# Altium PCB GPSDO_V3.0.PcbDoc (part 2 of 2)
Units mil, origin at the board's own origin, x right, y up, seen from the top; angles counter-clockwise.
Board outline 3461 x 3930 mil, 2 copper layers (Top Layer, Bottom Layer); 105 components, 60 nets, 438 pads, 188 vias.
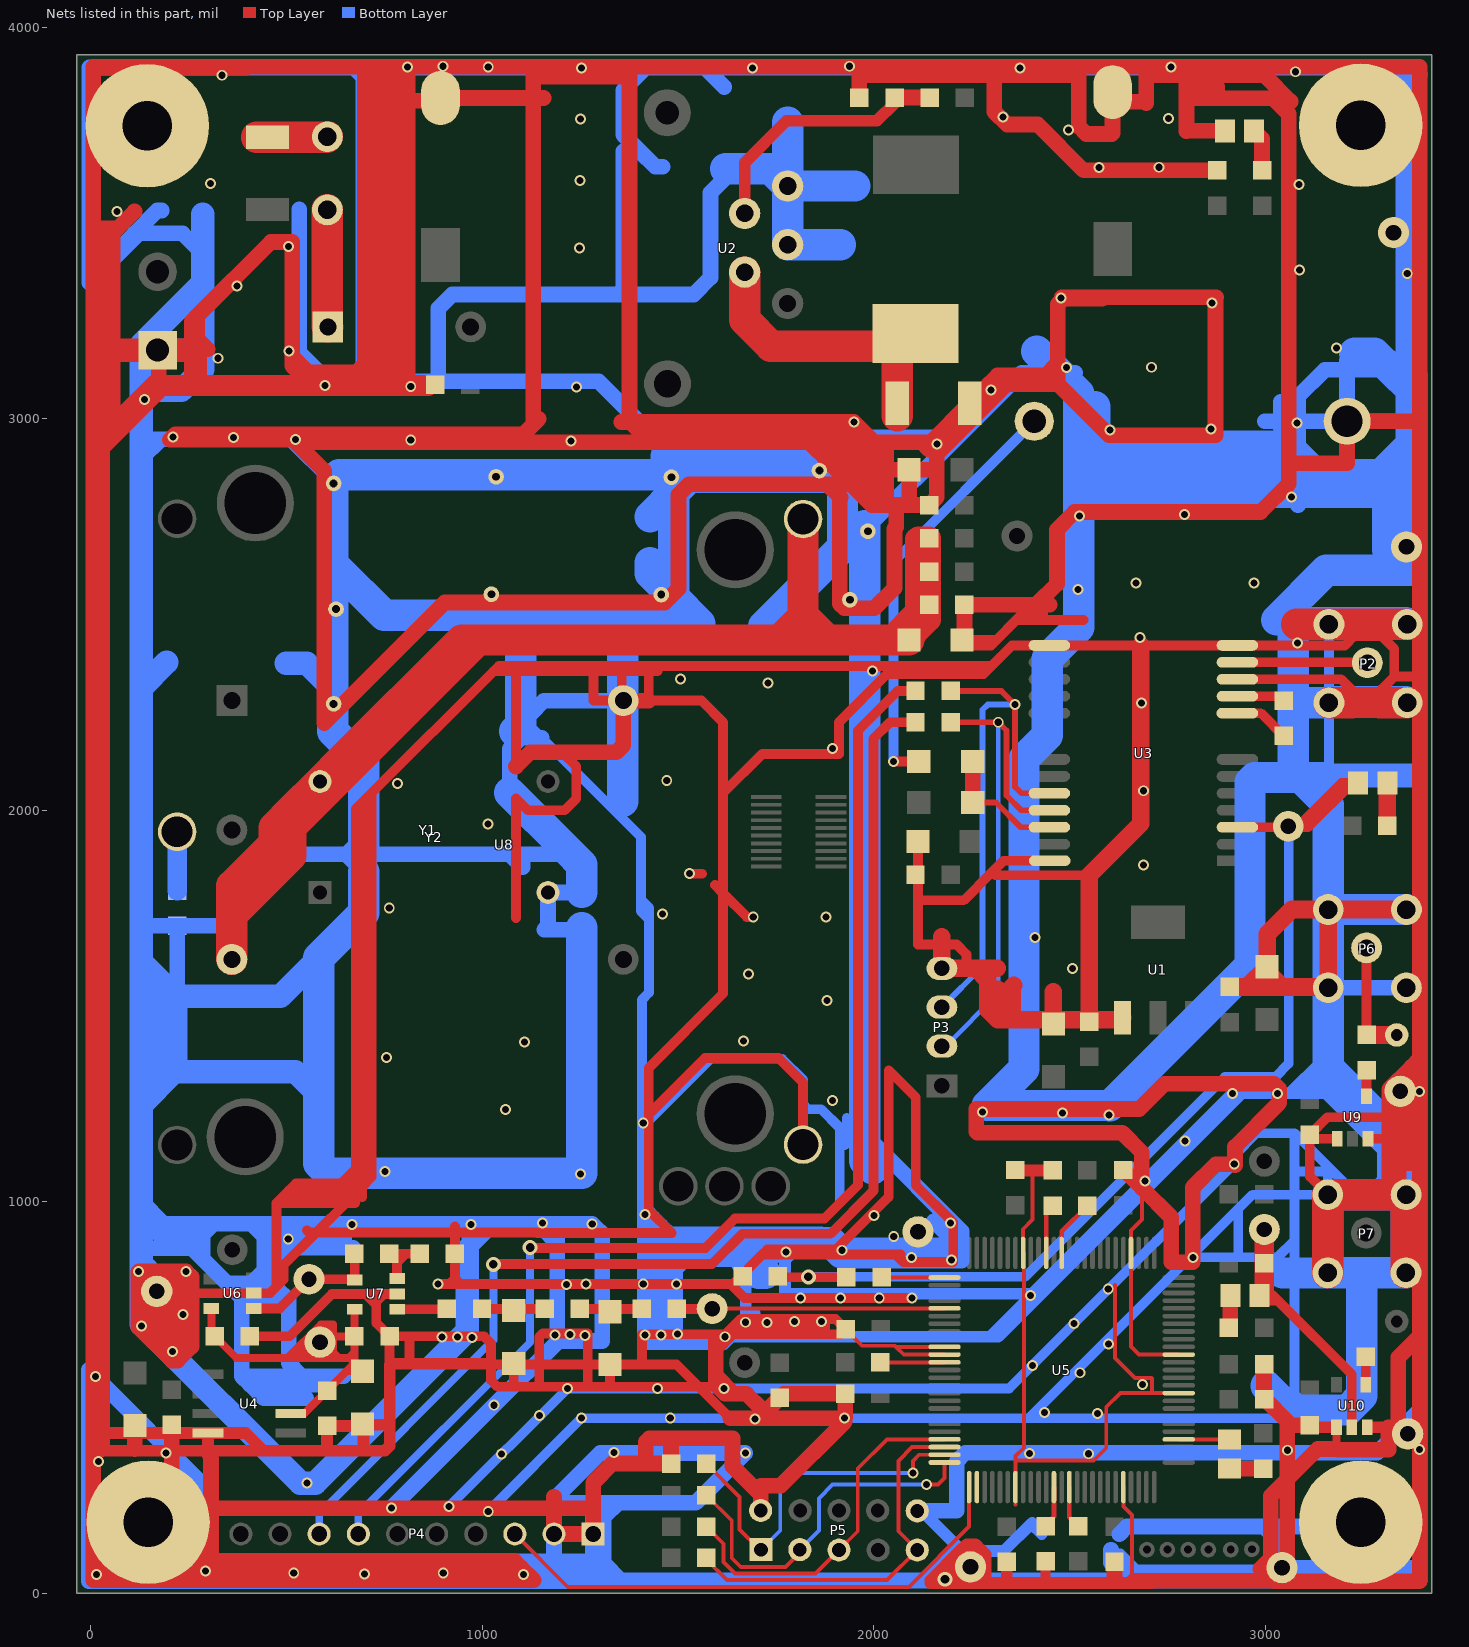
[diagram p2: the nets of this part, all layers, seen from the top]

## Via types
v1: diameter 28, hole 18, Top Layer to Bottom Layer, 176 vias
v2: diameter 38, hole 22, Top Layer to Bottom Layer, 9 vias
v3: diameter 58, hole 38, Top Layer to Bottom Layer, 3 vias

## Nets (pads, with @x,y where several pads share a name; then routed paths per layer and width w, separated by ;. In a path a pad name is that pad's centre, name@x,y a point inside that pad or via, vN(x,y) a via of type N, cw(c..) or ccw(c..) an arc to the next point about the centre after c; other vN are vias at no path point) (continued)
GND: BT1.2 C1.1 C2.1 C3.1 C4.1 C5.1 C6.1 C7.1 C8.1 C9.2 C10.1 C11.2 C12.2 C13.1 C14.1 C15.1 C18.2 C19.2 C20.2 C21.1 C22.1 C23.2 C24.1 C25.2 C26.1 C27.2 C28.1 C29.1 C30.1 C31.1 C32.1 C33.1 C34.1 C35.1 C36.2 D2.1 L7.1 LED2.2 P1.1 P2.2 P3.4 P4.1 P4.2 P5.2 P5.10 P6.2 P7.2 pad. pad.0@620,2272 pad.0@620,2835 pad.0@626,2514 pad.0@1023,2552 pad.0@1035,2852 pad.0@1457,2551 pad.0@1483,2851 pad.0@1861,2868 pad.0@1939,2538 pad.0@1985,2713 pad.1@168,771 pad.2 pad.3 pad.4 pad.6 pad.7 pad.10 R4.1 R10.1 R15.1 R23.1 R27.2 U1.1 U2.3 U2.5 U3.10 U3.12 U3.13 U3.24 U4.4 U5.10 U5.11 U5.32 U5.46 U5.60 U5.65 U5.79 U5.93 U6.2 U7.2 U8.4 U9.1 U9.3 U10.1 U10.3 Y1.5 Y2.4 | length 179678.4
  Top Layer w10: C29.1@1928,674 1970,632 2054,632 2056.94,629.06 ; U5.11@2180.79,609.37 2076.63,609.37 2056.94,629.06 ; U5.10@2180.79,629.06 2056.94,629.06 ; 2361.89,226.11 U5.32@2361.89,270.79 2361.89,339 ; C31.1@2362,1081 C31.1@2363,1080 ; 2403,1080 2406,1077 2406,954 2381.57,929.57 U5.93@2381.57,869.21 2383.35,867.43 2383.35,800 2383.35,371.35 2361.89,349.89 2361.89,339 ; 2616,787 2616,601 2667,550 2710,550 2711,549 2711,510.94 ; U5.46@2637.48,270.79 2637.48,221.52 2659.85,199.15 2659.85,35.99 2664,31.84 ; 2685,1035 2685,954 2657.17,926.17 U5.79@2657.17,869.21 2657.17,629.83 2677.63,609.37 U5.65@2779.21,609.37 ; U5.60@2779.21,510.94 2711,510.94 ; 2361.89,339 2562,339 2594,371 2594,475 2629.94,510.94 2711,510.94
  Top Layer w20: 3182,368 U10.1@3182,424
  Top Layer w25: 235,769 237.63,766.37 257,766.37 U6.2@416.08,766.37 457.37,766.37 474,783 ; C18.2@406,656 507,656 615.37,764.37 701,764.37 ; 552,927 557.5,921.5 575.5,921.5 ; 670,1011 665,1011 ; 671.5,1028.5 620.5,1028.5 ; 675,997 651,997 ; 677,1004 677,1023 ; 693,1012 693,1039 ; 763,584 1022,584 ; U7.2@782.08,764.37 748.37,764.37 ; v1(887,790) 916,790 ; 930,937 930,921.5 ; 1018,588 814,588 ; C21.1@1080,586.8 C21.1@1080,584 ; C21.1@1080,587 C21.1@1077,584 ; 1086,1725 1086,2030 1116,2000 1210,2000 1240,2030 1240,2112 1204,2148 ; 1086,2112 1086,2355 ; 1269,528 1269,584 ; C22.1@1326,583.8 1326,527 ; Y1.5@1356,2284.32 1356,2355 ; Y1.5@1360,2280.32 1284,2280.32 1284,2355 ; v1@1408,655 1408,584 ; v1@1408,661.5 v1(1498,661.5) 1583.5,661.5 ; 1448,2355 1424,2355 ; v1(1529,1838) 1562,1838 ; 1590.5,527 1553,527 ; 1594,1809 1615,1788 ; 1596.25,616 1641.75,661.5 ; 1596.25,648.75 1583.5,661.5 ; v1(1620,655) 1620,660 v1@1621.5,661.5 ; C13.1@1665,809 1646,790 1640,790 ; v1(1692,1727) 1676,1727 1615,1788 ; 1711,450 1630,450 1553,527 ; U8.4@1819.21,1145.79 1819.21,1304.79 1757,1367 1569,1367 1425,1223 ; 1864,680 1858,686 1646,686 ; 2069,865 2056,865 ; v1(2098,754) 1670,754 1634,790 ; C6.1@2112.96,1920 2112.96,1770 ; C23.2@2231.6,2441.6 C23.2@2225,2435 ; 2237,1596 2237,1632 2211.96,1657.04 2174,1657.04 2112.96,1657.04 2112.96,1770 ; 2404.5,2526.5 2403,2525 2386.5,2508.5 ; 2433,2503 2427.5,2508.5 2386.5,2508.5 ; 2439,27.5 R27.2@2439,81 ; U3.24@2449.5,1871.18 2331.18,1871.18 2302.5,1842.5 ; 2536,2486 2364,2486 ; 2550,1834 2311,1834 2302.5,1842.5 ; U3.10@2929,2334.75 2929.25,2335 3194,2335 3219,2310 3219,2278.03 3221.76,2275.27 3222,2275.03 3292,2275.03 3292.24,2275.27 3298,2281.03 3298,2310 3330,2342 ; P7.2@3159.97,1018.03 3114,1064 C27.2@3114,1171 ; U9.1@3184,1161 3124,1161 C27.2@3114,1171 ; U9.3@3262.74,1160.96 3317,1160.96 3348,1160.96 ; pad.3@3345,1282 3348,1279 3348,1216 ; P7.2@3348,1030 3348,1099 3348,1160.96 ; 3394.5,1161 3394.46,1160.96 3374,1160.96 3348,1160.96 ; 3394.5,1216 3374,1216 3348,1216 ; 3394.5,2342 3330,2342 ; 474,783 492,801 492,838 575.5,921.5 ; 474,783 474,997 ; 474,997 651,997 ; 474,997 488,1011 ; 488,1011 505.5,1028.5 ; 488,1011 665,1011 ; 505.5,1028.5 620.5,1028.5 ; 505.5,1028.5 524,1047 639,1047 ; 575.5,921.5 578,924 651,997 ; 575.5,921.5 930,921.5 ; 620.5,1028.5 639,1047 ; 639,1047 677,1085 ; 639,1047 677,1047 ; 651,997 665,1011 ; 665,1011 677,1023 ; 677,1023 677,1047 ; 677,1023 693,1039 ; 677,1047 677,1085 ; 677,1085 677,2004 693,2020 ; 677,1085 693,1101 ; 693,1039 693,1101 ; 693,1039 717,1063 717,1543 717,2044 ; 693,1101 693,2020 ; 693,2020 717,2044 ; 701,764.37 748.37,764.37 ; 701,764.37 729,736.37 ; 717,2044 1028,2355 ; 729,736.37 729,745 748.37,764.37 ; 729,736.37 729,690 C19.2@763,656 ; C19.2@763,656 814,656 ; C19.2@763,656 763,588 814,588 ; 814,588 814,656 ; 814,656 1004,656 1022,638 1022,584 ; 916,790 944,790 ; 916,790 930,804 ; 930,804 R10.1@930,867 930,921.5 ; 930,804 944,790 ; 930,921.5 1137.95,921.5 1139.45,920 1484,920 1425,979 1425,1223 ; 944,790 v1(1265,790) v1(1411,790) v1(1496,790) 1634,790 ; 1022,584 C21.1@1077,584 ; 1022,584 1022,544 1039,527 1080,527 ; 1028,2355 1042,2369 2301,2369 ; 1028,2355 1086,2355 ; C21.1@1077,584 C21.1@1080,584 ; 1080,527 1145,527 ; 1080,527 C21.1@1080,584 ; C21.1@1080,584 1145,584 ; 1086,2355 1284,2355 ; 1145,527 1326,527 ; 1145,527 1145,584 ; 1145,584 1269,584 ; 1145,584 1145,654 1154,663 1269,663 1269,584 ; 1269,584 1408,584 ; 1284,2355 1356,2355 ; 1326,527 1553,527 ; 1356,2355 1424,2355 ; 1408,584 1496,584 1553,527 ; 1424,2355 1425,2354 1425,2280.32 1559.68,2280.32 1615,2225 1615,2044 ; 1425,1223 1425,1342 1615,1532 1615,1788 ; 1583.5,661.5 v1@1621.5,661.5 ; 1615,1788 1615,2044 ; 1615,2044 1715,2144 1911,2144 1911,2225 2034.12,2348.12 2280.12,2348.12 2301,2369 ; v1@1621.5,661.5 1646,686 ; v1@1621.5,661.5 1641.75,661.5 ; 1634,790 1640,790 ; 1640,790 1715,865 ; 1641.75,661.5 1878,661.5 ; 1646,686 1660,700 v1@1875,700 ; 1715,865 2056,865 ; 1715,865 1728,878 1904,878 2038,1012 2038,1336 2107,1267 2107,1043 2203,947 2203,846 2075,846 2056,865 ; v1@1875,700 1902,700 C29.1@1928,674 1915.5,661.5 1878,661.5 ; v1@1875,700 1875,664.5 1878,661.5 ; 2112.96,1770 2230,1770 2302.5,1842.5 ; C23.2@2225,2435 2313,2435 ; C23.2@2225,2435 2238.63,2421.36 2299.36,2421.36 2313,2435 ; 2301,2369 2353.36,2421.36 U3.13@2448.68,2421.36 2682,2421.36 2856,2421.36 U3.12@2929,2421.36 3203.36,2421.36 3227,2445 3297,2445 3330,2412 3330,2342 ; 2313,2435 2364,2486 ; 2364,2486 2386.5,2508.5 ; C27.2@3114,1171 3159,1216 3317,1216 3348,1216 ; 3348,1160.96 3348,1216
  Top Layer w30: 7,409 29,409 112,409 206,409 U4.4@299,409 ; 8,364 206,364 299,364 ; 299,351 299,364 ; 603,365 C14.1@603,427 C15.1@689.2,427 ; 762.8,429.8 696,429.8 696,364 ; 763,584 763,376 751,364 696,364 ; pad.7@2247,67 2243.91,63.91 2192.09,63.91 2215.5,40.5 2215.5,35.5 v2(2182,35.5) v2@2192,25.5 ; C34.1@2340,80 2340,26.5 2341,25.5 ; C31.1@2363,1080 2403,1080 R23.1@2457,1080 ; 2710,25.5 2341,25.5 ; C36.2@3114,429 3119,424 U10.1@3171,424 ; 3182,368 3184,366 ; U10.3@3270,423.96 3315,423.96 ; pad.2@3339.75,423.96 3393.46,423.96 pad.2@3394.5,425 ; 299,364 440,364 ; 299,364 U4.4@299,409 ; U4.4@299,409 395,409 440,364 ; 440,364 696,364 ; v2@2192,25.5 2290,25.5 ; v2@2192,25.5 2145,25.5 2145,32.82 2221.09,108.91 ; 2221.09,108.91 2273.91,108.91 2275,110 ; 2221.09,108.91 2237.18,125 2260,125 2275,110 ; 2275,110 2286,99 2286,29.5 2290,25.5 ; 2290,25.5 2341,25.5
  Top Layer w40: 6,3899.5 723,3899.5 ; 10,2942 55,2987 ; 15.5,65.5 279,65.5 ; 29,368 29,409 29,2926 ; 30.25,3002.25 30.25,3176 55,3176 ; 30.25,3407.75 6,3383.5 ; 111,3530 55,3474 55,3176 ; 112,368 112,409 C8.1@112,427.8 ; v1@122,822 182.5,822 ; P1.1@170,3176 173,3176 173,3092 ; pad.@206,241 206,364 206,409 C7.1@206,430 ; v1(235,712) 235,769 235,809 223,821 ; pad.@245,82 279,82 ; 277,3098 277,3177 276,3176 257,3176 ; 298,3178 271.5,3204.5 271.5,3263.5 ; 306.5,343.5 306.5,216.5 ; 396.5,3897.5 6,3897.5 6,3472 ; v1(523,2947) 202,2947 216,2961 1105,2961 1130,2986 ; 748,3101 748,3842.75 ; 777,3099 777,3813.75 ; v1@809,3091 v1@809,3092 ; 1086,2112 1122,2148 1204,2148 1342,2148 1360,2166 Y1.5@1360,2280.32 1425,2280.32 ; 1144,3000 1130,2986 ; 1156,3820 1130,3820 ; 1183,246 1183,216.5 ; 1355,2992 1378,2992 ; 1596.25,571 1596.25,555.75 ; 1596.25,648.75 1596.25,616 1596.25,555.75 ; 1633,447 v1(1925,447) 1927,449 C28.1@1927,509 1770,509 C20.2@1760,499 1711,450 1711,473 1675,509 1643,509 ; P5.2@1711,211 1711,252 ; v1@1926,438 1762,274 1711,274 1711,252 ; R4.1@1963,3821 1963,3877 1964,3878 2308,3878 ; 2017,2927 1949,2927 ; 2091,2801 2090.2,2801.8 C25.2@2090.2,2870 ; 2160,2870 C25.2@2090.2,2870 ; v1@2160.2,2940 2141.6,2921.4 2123,2940 ; v1(2161,2936) 2161,2910 ; C23.2@2231.6,2441.6 C24.1@2231.6,2525 2403,2525 2415,2525 ; D2.1@2254,3031 D2.1@2245,3040 ; 2449,2525 2415,2525 ; v1@2480,3311 2875,3311 2873,3309 2873,2958 2601,2958 2470,3089 ; 2583,3307 2484,3307 2470,3293 2470,3142 ; C11.2@2610,3835 C11.2@2610,3810 ; C35.1@2615,80 2615,35.5 2620,30.5 ; C32.1@2637,1081 2639,1081 2685,1035 ; 2664,31.84 pad.2@3022,31.84 ; 2801,3819 2877,3819 ; C12.2@2877,3635 2799,3635 2536,3635 2419,3752 2341,3752 2308,3785 2308,3878 ; LED2.2@2897.2,3736 2800,3736 2799,3735 2799,3849 ; v1(2921,1096) 2874,1096 2815,1037 v1(2815,858) 2815,846 2814,845 2760,845 2760,960 2685,1035 ; v1@2923,1093 2923,1140 3036,1253 3036,1288 3023,1301 2742,1301 2678,1237 2262,1237 2262,1179 2265,1176 2635,1176 2685,1126 2685,1035 ; 2988,62 3014,88 3014,248 3056,290 ; C30.1@2997,585 C33.1@2997,495 3000.43,495 3056,439.43 ; 3065,3811 2998,3878 2795,3878 ; C36.2@3114,429 3066.43,429 3056,439.43 ; 3182,368 3134,368 3056,290 ; 3184,366 3315,366 3315,423.96 ; 3318,1018.03 3317,1019.03 3317,1075.03 ; pad.2@3339.75,423.96 3339.75,602.25 3394.5,657 ; 3374,1104 3374,1160.96 3374,1216 3374,1344.5 ; 6,2903 6,33 1131,33 1098.5,65.5 ; 6,2903 29,2926 ; 6,2903 6,3383.5 ; 6,3383.5 6,3427.5 ; 6,3427.5 6,3472 ; 6,3427.5 65.5,3487 21,3487 6,3472 ; 29,2926 173,3070 ; 55,2987 160,3092 173,3092 ; 55,2987 55,3176 ; 152,821 182.5,821 ; 152,821 152,663 185,630 v1@210,630 ; 152,821 121,821 121,680 207,594 221,594 257,630 ; 173,3070 173,3092 ; 173,3070 181,3078 863,3078 849,3092 v1@809,3092 ; 173,3092 257,3092 ; 182.5,821 182.5,657.5 v1@210,630 ; 182.5,821 202,821 ; 182.5,821 182.5,822 ; 182.5,822 202,822 ; 202,821 223,821 ; 202,821 202,822 ; 202,821 202,685 223,664 ; 202,822 v1(243,822) 257,808 257,766.37 257,630 ; v1@210,630 257,630 ; 223,664 223,821 ; 223,664 257,630 ; 257,3092 581,3092 ; 257,3092 257,3176 ; 257,3176 257,3249 271.5,3263.5 ; 271.5,3263.5 460,3452 514,3452 514,3159 ; 279,65.5 279,35 306.5,62.5 306.5,65.5 ; 279,65.5 306.5,65.5 ; 279,65.5 279,82 ; 279,82 306.5,82 ; 279,82 279,216.5 306.5,216.5 ; 306.5,65.5 1098.5,65.5 ; 306.5,65.5 306.5,82 ; 306.5,82 1082,82 1098.5,65.5 ; 306.5,82 306.5,216.5 ; 306.5,216.5 1183,216.5 ; 514,3159 554,3119 ; 514,3159 514,3136 531,3119 554,3119 ; 554,3119 679,3119 ; 554,3119 581,3092 ; 581,3092 652,3092 ; 652,3092 679,3119 ; 652,3092 697,3092 ; 679,3119 699.38,3139.38 699.38,3891.38 723,3867.75 ; 697,3092 v1@809,3092 ; 697,3092 723,3118 723,3867.75 ; 723,3867.75 748,3842.75 ; 723,3867.75 723,3899.5 ; 723,3899.5 748,3899.5 ; 748,3842.75 777,3813.75 ; 748,3842.75 748,3899.5 ; 748,3899.5 777,3899.5 ; 777,3813.75 777,3899.5 ; 777,3813.75 777.75,3813 809,3813 ; 777,3899.5 v1(809,3899.5) ; v1@809,3092 809,3813 ; 809,3813 893,3813 C9.2@893,3820 1130,3820 ; 809,3813 v1(809,3899.5) ; v1(809,3899.5) 1130,3899.5 ; 1130,2986 1130,3820 ; 1130,3820 1130,3874 ; 1130,3874 1130,3899.5 ; 1130,3874 1373,3874 1376,3871 ; 1130,3899.5 1376,3899.5 ; 1183,216.5 1283,216.5 ; 1183,216.5 P4.2@1183,151 P4.1@1283,151 1283,216.5 ; 1283,216.5 1283,282 1332,331 1417,331 ; 1376,3871 1376,3899.5 ; 1376,3871 1376,2994 1378,2992 ; 1376,3899.5 v1(2759,3899.5) 3394.5,3899.5 3394.5,3313 3394.5,2997 ; 1378,2992 1409.5,2960.5 ; 1378,2992 v1(1949,2992) ; 1409.5,2960.5 1430,2940 ; 1409.5,2960.5 1949,2960.5 ; 1417,331 R15.1@1482,331 1482,389 1489,396 ; 1417,331 1417,386 1427,396 1489,396 ; 1430,2940 523,2940 596,2867 596,2223 904,2531 1466,2531 1501,2566 1501,2806 1528,2833 1881,2833 ; 1430,2940 1835,2940 1848,2927 ; 1489,396 1639,396 1639,324 1711,252 ; 1596.25,555.75 1643,509 ; 1596.25,555.75 1596.25,532.75 1620,509 1643,509 ; 1848,2927 1875,2900 ; 1848,2927 1949,2927 ; 1875,2900 1895,2880 ; 1875,2900 1949,2900 ; 1881,2833 1942,2833 ; 1881,2833 1915,2799 1913,2797 1913,2528 1925,2516 2001,2516 2053,2568 2053,2719.61 2057,2723.61 2057,2780 ; 1895,2880 1932,2880 ; 1895,2880 1942,2833 ; 1932,2880 1979,2833 ; 1932,2880 1958,2880 ; 1942,2833 1979,2833 ; 1942,2833 1995,2780 2032,2780 ; 1949,2900 1949,2927 ; 1949,2900 1949,2889 1958,2880 ; 1949,2900 2026,2900 2032,2894 ; 1949,2927 1949,2960.5 ; 1949,2960.5 v1(1949,2992) ; 1949,2960.5 1953.5,2960.5 1967,2974 ; v1(1949,2992) 1967,2974 ; 1958,2880 1968,2870 1997,2870 ; 1958,2880 1987,2880 1997,2870 ; 1967,2974 2001,2940 2030,2940 ; 1979,2833 2031,2833 2032,2832 ; 1979,2833 2032,2780 ; 1997,2870 2032,2870 ; 2030,2940 2123,2940 ; 2030,2940 2032,2938 2032,2894 ; 2032,2780 2032,2832 ; 2032,2780 2057,2780 ; 2032,2832 2032,2870 ; 2032,2870 2032,2894 ; 2032,2870 C25.2@2090.2,2870 ; 2057,2780 C26.1@2141.6,2780 2161,2799.4 2161,2910 ; 2123,2940 2145,2940 D2.1@2245,3040 ; 2161,2910 2340,3089 ; D2.1@2245,3040 2294,3089 ; 2294,3089 2340,3089 ; 2294,3089 2316,3111 2439,3111 2470,3142 ; 2308,3878 2524,3878 2524,3747 2543,3728 2608,3728 2610,3730 C11.2@2610,3810 ; 2340,3089 2470,3089 ; 2415,2525 2468,2578 2468,2717 2513,2762 2988,2762 3060,2834 3060,2887 ; 2470,3089 2470,3142 ; C11.2@2610,3810 2693,3810 2696,3807 2696,3878 2795,3878 ; 2795,3878 2799,3874 2799,3849 ; 2799,3849 2877,3849 2877,3819 ; 2877,3819 3020,3819 3060,3779 3060,3375 3060,2887 ; pad.2@3022,31.84 3056,31.84 3056,290 ; pad.2@3022,31.84 3023.34,30.5 3394.5,30.5 3394.5,425 3394.5,657 ; 3056,290 3056,439.43 ; 3060,2887 3210,2887 3209.21,2887.79 BT1.2@3209.21,2994 3391.5,2994 3394.5,2997 ; 3317,1075.03 3317,1160.96 3317,1216 3317,1287.5 3374,1344.5 ; 3317,1075.03 3340.97,1099 3348,1099 3394.5,1099 ; 3374,1344.5 3394.5,1365 ; 3394.5,657 3394.5,1099 ; 3394.5,1099 3394.5,1161 3394.5,1216 3394.5,1365 ; 3394.5,1365 3394.5,2342 3394.5,2549 3394.5,2997
  Top Layer w45: 2174,1677 2174,1657.04 P3.4@2174,1596 2237,1596 2260,1596 ; 2315,1596 2260,1596 ; 2317.2,1542.2 2317.2,1464.8 ; 2358,1553 2353,1548 2353,1464.8 ; C4.1@2459,1454.2 C4.1@2459,1464.8 ; 2459,1536 C4.1@2459,1464.8 ; C3.1@2550,1460 C3.1@2550,1464.8 ; U1.1@2635.45,1469.95 2630.3,1464.8 C3.1@2550,1464.8 ; 2682,2421.36 2682,1966 2550,1834 C3.1@2550,1464.8 ; C1.1@2910,1548.6 2953.4,1548.6 ; P6.2@3360.97,1746.53 P6.2@3160.97,1746.53 ; 2260,1596 2291,1565 2291,1491 2317.2,1464.8 ; 2317.2,1464.8 2353,1464.8 ; 2353,1464.8 C4.1@2459,1464.8 ; C4.1@2459,1464.8 C3.1@2550,1464.8 ; 2953.4,1548.6 C2.1@3005,1600.2 ; 2953.4,1548.6 3044,1548.6 ; C2.1@3005,1600.2 3005,1684 3067.53,1746.53 P6.2@3160.97,1746.53 ; C2.1@3005,1600.2 3005,1587.6 3044,1548.6 ; 3044,1548.6 3158.9,1548.6 P6.2@3160.97,1546.53 P6.2@3160.97,1746.53
  Top Layer w60: 30.25,3176 30.25,3407.75 ; 55,3176 P1.1@170,3176 ; P1.1@173,3176 257,3176
  Top Layer w80: 3079.97,2475.03 P2.2@3162.97,2475.03 P2.2@3362.97,2475.03 ; P7.2@3159.97,818.03 P7.2@3159.97,1018.03 3318,1018.03 P7.2@3359.97,1018.03 ; P2.2@3162.97,2275.03 3222,2275.03 ; P2.2@3163.2,2275.27 3221.76,2275.27 3292.24,2275.27 P2.2@3362.73,2275.27 ; 3292,2275.03 P2.2@3362.5,2275.03 ; P7.2@3359.73,818.27 P7.2@3359.73,1017.8
  Bottom Layer w25: v1(915,221) v1(1217,523) v1(1447,523) v1(1617,523) 2346,523 v1(2512,689) 2921,1098 2921,1118 2978,1175 3075,1175 ; v1(1015,209) v1(1253,447) v1(1925,447) 2397,447 ; 1125,2248 1125,2212 1152,2185 1405,1932 1405,1772 ; 1424,636 1408,652 1408,997 ; 1425.5,862.5 1425.5,979.5 ; 1441.5,895.5 1441.5,963.5 ; 1459,896 1462,899 1462,943 ; 1484,921 1462,943 ; 1913,1005 1913,1189 1866,1236 1832,1236 1820,1248 1820,1311 1766,1365 1583,1365 v1@1408,1190 ; 1926,1145 1931,1150 1931,1214 ; v1(2815,858) 3032,858 3075,901 ; 2931,864 2931,981 ; 3026,103 2984,61 2670,61 ; 3086,447 2397,447 ; 3088,1077 3159.97,1077 ; 3115,468 3075,508 3075,818.03 3075,901 ; 3153,2084 3162.97,2093.97 P2.2@3162.97,2275.03 3362.5,2275.03 P2.2@3362.73,2275.27 ; P2.2@3162.97,2278 P2.2@3162.97,2475.03 ; 3231.97,1018.03 3159.97,1090.03 ; 1405,1772 1405,1742 1426,1721 ; 1405,1772 1426,1751 1426,1721 ; 1408,997 1425.5,979.5 ; 1408,997 v1@1408,1190 ; v1@1408,1190 1408,1516 1426,1534 1426,1721 ; 1425.5,979.5 1441.5,963.5 ; 1441.5,963.5 1462,943 ; 2397,447 2931,981 ; 2630,60 2631,61 2670,61 ; 2630,60 2627,57 2630,54 2630,60 ; 2630,60 2630,101 2670,61 ; 2931,981 2968.03,1018.03 3075,1018.03 ; 3075,901 3075,1018.03 ; 3075,1018.03 P7.2@3159.97,1018.03 3159.97,1077 ; 3075,1018.03 3075,1175 ; 3075,1175 3159.97,1090.03 ; 3159.97,1077 3159.97,1090.03
  Bottom Layer w30: 1459,896 1425.5,862.5 1424,861 v1@1424,655 ; 1462,899 1484,921 1866,921 1892,895 ; v1(1498,661.5) 1498,840 1511,853 1511,872 1510,873 ; 1650,873 1673,850 v1@1673,692 ; 1673,676 v1@1673,692 ; 1696,715 v1@1673,692 ; 1818,895 1773,850 1773,765 v1@2405,765 ; P5.10@2111,210 2122,210 2211.5,120.5 ; 2132,32 2128,32 2211.5,115.5 2211.5,120.5 ; v1(2400,760) v1@2405,765 ; 2429,151 2405,175 2405,180 2332.5,107.5 2224.5,107.5 2211.5,120.5 ; 3148,1362 3063,1277 ; 3160.97,1343.03 3125.97,1308.03 ; 3227,1277 3156,1277 ; 3320,1112 3155,1277 ; v1@1424,655 1498,655 v1(1620,655) 1636,655 ; v1@1424,655 1424,636 1617,636 1636,655 ; 1636,655 2297,655 ; 1636,655 v1@1673,692 ; 2297,655 2407,765 v1@2405,765 ; 2297,655 2318,655 2940,1277 ; v1@2405,765 v1(2693,1053) v1(2795,1155) v1(2917,1277) 2940,1277 ; 2940,1277 v1(3031,1277) 3063,1277 ; 3063,1277 3094.94,1277 ; 3094.94,1277 3155,1277 ; 3094.94,1277 3125.97,1308.03 ; 3125.97,1308.03 3125.97,1307.03 3156,1277 ; 3155,1277 3156,1277
  Bottom Layer w40: 45,519.5 -5.5,570 -5.5,536.5 ; 116.75,3468.25 -4,3347.5 -4,3386 ; 124,803 124,881 129,881 210,881 ; 129,962 182,909 ; 129,1001 186.63,943.37 285,943.37 ; 129,2899 178,2948 ; 133,2948 178,2948 ; 136,1705 L7.1@220,1705 ; 181,3532.5 169.5,3532.5 111,3474 ; 220,1529 L7.1@220,1705 ; 285,3423 234,3474 111,3474 ; v1(293,56) 340,56 ; 462.5,891.87 442.68,911.69 ; 532,3535 532,3169 605,3096 1297,3096 1411,2982 1814,2982 ; 550,498 441,498 406,533 ; 576,533 406,533 ; pad.0@618,2841 511,2948 178,2948 ; 646,554 538,554 ; 646.75,905.75 v1@491.75,905.75 ; 670,882 517,882 473,838 473,781 ; 696,3105 696,3873 671,3898 ; 697,1843 652.32,1887.68 ; 697,1887.68 1070,1887.68 1103,1854.68 1103,1887.68 1199.68,1887.68 1213.5,1901.5 ; 697,1932 652.68,1887.68 652.32,1887.68 ; v1(768,218) v1(1030,480) 1191,641 ; 887,3100 887,3282 923,3318 1347,3318 ; 961,876 966,881 ; 1070,2045 1070,2157 1098,2185 1152,2185 ; 1125,2248 1157.32,2280.32 Y1.5@1359,2280.32 ; 1183,43 1183,56 ; 1192,231 1282,231 ; 1254,1700 1249,1695 1158,1695 1167.68,1704.68 Y2.4@1167.68,1790 1254,1790 ; 1418,2953 2213,2953 ; 1424,32 1354.5,32 ; 1461,3644 1442,3644 1402,3684 ; 1618,3848 1568,3898 ; 1621,3639 1621,3616 1583,3578 1583,3361 1540,3318 1347,3318 ; 2084,866 2100.5,849.5 2225,849.5 2225,903 ; P5.10@2122,210 2212,210 2212,337 2234,359 3285.5,359 3394.5,468 ; 2128,32 1354.5,32 ; 2132,32 2652,32 ; 2162,950 2154,950 2201,903 2225,903 ; 2169.75,52.75 2224.5,107.5 ; 2514,3118 2471,3118 2378,3118 2213,2953 ; 2606,111 2606,78 2627,57 ; 2627,150 2647,170 2996,170 ; 2630,54 2652,32 ; 2999,2994 3040,2994 ; pad.2@3026,33 pad.2@3026,64 ; 3040,3044 3040,2994 ; 3084,2779 3084,2812 3084,2858 3084,2904 3084,2932 ; 3153,2084 3159,2078 3394.5,2078 ; 3158,2858 3084,2932 ; P6.2@3161.2,1546.77 P6.2@3360.73,1546.77 ; 3162.97,2093.97 3169,2100 3394.5,2100 ; 3209.21,2865.79 BT1.2@3209.21,2994 ; 3209.21,3149.21 3209.21,3125.5 ; pad.@3244,181 3233,170 3026,170 ; 3368.5,2994 BT1.2@3209.21,2994 ; -5.5,536.5 -5.5,30.5 1202,30.5 ; -5.5,536.5 v1(11,553) 289,275 289,107 315,81 ; -4,3386 23,3386 111,3474 ; -4,3386 -4,3898 671,3898 ; 182,909 278.63,909 ; 182,909 210,881 ; 210,881 258,881 268,871 ; L7.1@220,1705 344,1705 526.68,1887.68 652.32,1887.68 ; 268,871 285,854 ; 268,871 268,898.37 278.63,909 ; 278.63,909 285,915.37 ; 278.63,909 285,909 ; 285,854 285,909 ; 285,854 347.5,791.5 ; 285,909 285,915.37 ; 285,915.37 313,943.37 ; 285,915.37 285,943.37 ; 285,943.37 313,943.37 ; 313,943.37 411,943.37 ; 315,81 1183,81 ; 315,81 340,56 ; 340,56 1183,56 ; 347.5,791.5 410,791.5 ; 347.5,791.5 385,754 ; 385,554 538,554 ; 385,554 406,533 ; 385,554 385,754 ; 385,754 473,754 ; 410,791.5 462.5,791.5 ; 410,791.5 442.68,824.18 442.68,911.69 ; 411,943.37 442.68,911.69 ; 411,943.37 562.63,943.37 ; 442.68,911.69 v1@497.69,911.69 ; 462.5,791.5 473,781 ; 462.5,791.5 462.5,876.5 v1@491.75,905.75 ; 473,754 473,781 ; 473,754 505,722 ; 473,781 505,749 505,722 ; v1@491.75,905.75 v1@497.69,911.69 ; v1@497.69,911.69 521,935 571,935 ; 505,722 505,587 538,554 ; 562.63,943.37 v1(1280.63,943.37) v1@1289,935 ; 562.63,943.37 571,935 ; 571,935 v1@966,935 ; 671,3898 1418,3898 ; 966,881 1020,935 ; 966,881 v1@966,935 ; v1@966,935 1020,935 ; 1020,935 v1@1150,935 ; v1@1150,935 1191,935 ; v1@1150,935 1191,894 ; 1183,56 1183,81 ; 1183,56 1310.5,56 ; 1183,81 1282,81 ; 1183,81 P4.2@1183,151 1183,240 1301,358 v1(1672,358) 1545,231 1347,231 ; 1191,641 1194,644 1306,644 1306,918 v1@1289,935 ; 1191,641 1191,894 ; 1191,894 1191,935 ; 1191,935 v1@1289,935 ; 1202,30.5 1310.5,30.5 1310.5,32 ; 1202,30.5 1203.5,32 1310.5,32 ; 1282,81 1282,231 ; 1282,81 1305.5,81 1310.5,76 ; 1282,231 1347,231 ; 1310.5,32 1354.5,32 ; 1310.5,32 1310.5,56 ; 1310.5,56 1310.5,76 ; 1310.5,76 1310.5,194.5 1347,231 ; 1310.5,76 1354.5,32 ; 1347,3318 1360,3331 1360,3684 1402,3684 ; 1402,3684 1360,3726 1360,3840 1418,3898 ; 1418,3898 1568,3898 ; 1568,3898 3382.5,3898 3382.5,3125.5 ; 2213,2953 1994,2734 1994,1155 2225,924 2225,903 ; 2652,32 2994,32 ; 2994,32 3394.5,32 3394.5,58 ; 2994,32 pad.2@3026,64 ; 2996,170 3026,170 ; 2996,170 3026,140 ; pad.2@3026,64 3388.5,64 3394.5,58 ; pad.2@3026,64 3026,103 3026,140 ; 3026,140 3026,170 ; 3040,2994 3040,2976 3084,2932 ; 3040,2994 v1@3084,2994 ; 3084,2932 v1@3084,2994 ; v1@3084,2994 3084,3057 3152.5,3125.5 3209.21,3125.5 ; v1@3084,2994 BT1.2@3209.21,2994 ; BT1.2@3209.21,2994 3209.21,3125.5 ; 3209.21,3125.5 3322,3125.5 3372.5,3125.5 3382.5,3125.5 ; 3382.5,3125.5 3394.5,3113.5 3394.5,2100 ; 3394.5,58 3394.5,468 ; 3394.5,468 3394.5,2078 ; 3394.5,2078 3394.5,2100
  Bottom Layer w60: 142,827 142,698 ; 177,1359 177,1525 ; 193,2378 129,2314 ; 279,3176 P1.1@170,3176 P1.1@129,3135 ; 285,3523 285,3423 285,3346 ; 499,2376 551,2376 618,2309 ; 582,1272 522,1332 213,1332 ; 582,1623 484,1525 216,1525 ; 961,876 961,669 573,281 v1(552,281) 535,281 v1@130,686 ; 129,711 129,881 129,962 129,1001 129,1248 ; 129,711 129,687 v1@130,686 ; 129,711 142,698 ; 129,1248 129,1311 ; 129,1248 213,1332 ; 129,1311 129,1525 ; 129,1311 150,1332 213,1332 ; 129,1525 129,1612 ; 129,1525 177,1525 ; 129,1612 129,2314 ; 129,1612 216,1525 ; 129,2314 129,2899 129,3073 ; 129,3073 P1.1@129,3135 ; 129,3073 231,3073 285,3127 285,3346 ; P1.1@129,3135 129,3190 285,3346 ; v1@130,686 142,698 ; 177,1525 216,1525 ; 213,1332 216,1335 216,1525
  Bottom Layer w80: 697,1843 697,1738 582,1623 582,1272 582,1098 607,1073 1254,1073 1254,1700 ; 697,1887.68 697,1932 697,2123 618,2202 618,2309 618,2617 ; 1070,2045 1213.5,1901.5 1254,1861 1254,1790 ; 1082,2202 1098,2218 1098,2498 ; 1359,2023 1359,2280.32 1359,2498 ; 1428,2633 1428,2605 1489,2544 ; 1428,2750 1489,2811 ; 1459,684 1459,822 1510,873 1650,873 1697,873 1713,857 1751,895 1818,895 1892,895 1918,869 2183,869 ; pad.0@1483,2851 1529,2851 ; 1513,2481 1496,2498 ; 1556,2477 1489,2544 ; 1621,3639 1736.03,3639 U2.5@1780.02,3595.01 ; 1673,850 1706,817 1723,817 ; 1718,2470 1920,2672 ; 1780.02,3757.98 U2.5@1780.02,3595.01 ; 1914.99,3445.01 U2.3@1780.02,3445.01 U2.5@1780.02,3595.01 ; 1951.99,3595.01 U2.5@1780.02,3595.01 ; 1961,2855 1957,2851 1920,2851 ; 1997,1084 1977,1104 1977,2727 1920,2670 1920,2672 ; 2416,3173 2471,3118 2524,3065 2524,2931 ; 2535,2812 2644,2812 ; 2565,3031 2565,2931 ; 2603,1245 2604,1246 ; 3002,530 3064,468 3115,468 3211,468 3247,504 3247,818.27 ; 3029,2486 3156,2613 3372.5,2613 3372.5,2858 ; 3044.03,818.03 3075,818.03 P7.2@3159.97,818.03 ; 3072,2103 3072,2278 ; 3084,2904 3057,2931 2565,2931 ; 3153,2084 3091,2084 ; P2.2@3162.97,2275.03 3074.97,2275.03 3072,2278 ; P2.2@3162.97,2278 3360,2278 P2.2@3362.73,2275.27 ; 3228,3168 3279.5,3168 3322,3125.5 3372.5,3075 ; 3317,2661 3313,2665 3313,2812 ; P2.2@3359,2479 3072,2479 3072,2278 ; P6.2@3360.97,1746.53 P6.2@3160.97,1746.53 ; 3369.5,2812 3313,2812 ; 3374.5,3879.5 3372.5,3877.5 3372.5,3125.5 3372.5,3075 ; 618,2617 618,2841 634,2857 1469,2857 1469,2905 1920,2905 1920,2851 ; 618,2617 630,2617 749,2498 1098,2498 ; 1098,2498 1359,2498 ; 1359,2498 1496,2498 ; 1489,2544 1489,2811 ; 1489,2544 1489,2505 1496,2498 ; 1489,2811 1529,2851 ; 1529,2851 1920,2851 ; 1920,2672 1920,2851 ; 2524,2931 2524,2823 2524,2468 2443,2387 2443,2191 2384,2132 2384,1340 2290,1246 2604,1246 ; 2524,2931 2565,2931 ; 2565,2931 2565,2891 2598,2858 ; 2598,2858 2644,2812 ; 2598,2858 3084,2858 3158,2858 3296.5,2858 ; 2604,1246 2961,1603 2961,2072 2973,2084 3091,2084 ; 2644,2812 3084,2812 3313,2812 ; 3091,2084 3160.97,2014.03 P6.2@3160.97,1746.53 ; P7.2@3159.97,818.03 3160.2,818.27 3247,818.27 ; P7.2@3159.97,818.03 P7.2@3159.97,1018.03 3231.97,1018.03 3297,1018.03 ; P6.2@3160.97,1746.53 P6.2@3160.97,1546.53 3160.97,1343.03 3227,1277 3325.5,1178.5 ; 3247,818.27 P7.2@3359.73,818.27 3359.97,818.5 P7.2@3359.97,1018.03 ; 3296.5,2858 3372.5,2858 ; 3296.5,2858 3372.5,2934 ; 3297,1018.03 3325.5,1046.53 ; 3297,1018.03 P7.2@3359.97,1018.03 ; 3325.5,1046.53 3359.97,1081 ; 3325.5,1046.53 3325.5,1178.5 ; 3325.5,1178.5 3359.97,1144.03 3359.97,1081 ; P7.2@3359.97,1018.03 3359.97,1081 ; 3372.5,2858 3372.5,2934 ; 3372.5,2934 3372.5,3075
  other v1: 14,47 1105,48 699,49 518,51 900,51 19,336 1049,355 2548,356 2398,357 192,358 1336,359 3057,365 3394,367 1697,445 1480,447 1146,454 2571,459 2436,462 2687,533 2527,563 2406,581 208,617 2600,637 974,653 897,654 936,654 1262,658 1415,659 1186,660 1456,660 1224,661 129,683 1727,691 1672,692 1797,694 1866,694 1813,754 1915,754 2014,754 2599,777 1215,789 121,822 2199,851 2096,858 1776,872 1919,876 504,905 2051,911 667,942 971,942 1153,946 2196,946 2001,965 1415,967 1251,1071 751,1077 1411,1201 2601,1222 2482,1227 2278,1229 1059,1235 1894,1259 3394,1281 755,1368 1108,1408 1667,1410 1881,1514 1680,1582 2508,1596 2412,1675 1878,1727 1460,1735 762,1750 2689,1860 1014,1965 2689,2050 783,2069 1471,2076 1894,2158 2684,2274 1730,2325 1506,2335 1997,2356 3083,2428 2680,2441 2522,2564 2670,2581 2971,2581 2526,2752 2794,2756 3067,2801 1226,2943 817,2946 364,2953 209,2954 2603,2972 2862,2974 3081,2989 137,3049 2300,3074 1241,3082 817,3083 598,3085 2492,3131 2710,3132 325,3155 506,3174 3182,3181 2864,3296 2478,3309 373,3339 3363,3372 3088,3381 1248,3437 505,3441 66,3530 3086,3599 305,3601 1249,3609 2575,3642 2729,3643 2498,3738 1251,3766 2753,3768 2330,3771 335,3878 3077,3887 2373,3896 1253,3897 1690,3897 1015,3899 899,3901 1938,3901
GPS_RX: P4.8 R5.1 | length 3205.7
  Top Layer w25: v2@1024,841 1587,841 1664,918 1889,918 1999,1028 1999,2183 2041,2225 R5.1@2106.56,2225
  Bottom Layer w20: P4.8@583,151 583,202 1028,647 v2(1028,840)
GPS_TX: P4.7 R6.1 | length 3166.9
  Top Layer w25: v2@1123,882 1570,882 1645,957 1874,957 1960,1043 1960,2204 2061,2305 R6.1@2106.56,2305
  Bottom Layer w20: P4.7@683,151 683,202 1122,641 v2(1122,883)
JTAG-TCK: P5.1 R15.2 U5.24 | length 927.5
  Top Layer w10: R15.2@1572,331 1657,246 1657,163 1709,111 P5.1@1712,111 ; v1(2100,307) 2100,338 2115.46,353.46 U5.24@2180.79,353.46
  Bottom Layer w10: P5.1@1712,111 1761,160 1761,263 1805,307 v1(2100,307)
JTAG-TDI: P5.9 R18.1 U5.23 | length 977.1
  Top Layer w10: R18.1@1572,90 1572,86 1625,33 2034,33 P5.9@2111,110 2063,158 2063,338 2098.15,373.15 U5.23@2180.79,373.15
JTAG-TDO: P5.3 R16.1 U5.25 | length 926.3
  Top Layer w10: R16.1@1572,250 1637,185 1637,90 1660,67 1774,67 1811,104 P5.3@1811,111 ; v1(2135,277) 2164,277 2180.79,293.79 U5.25@2180.79,333.78
  Bottom Layer w10: P5.3@1811,111 1860,160 1860,242 1895,277 v1(2135,277)
JTAG-TMS: P5.5 R17.1 U5.22 | length 921.8
  Top Layer w10: R17.1@1572,170 1616,126 1616,79 1645,50 1851,50 P5.5@1911,110 1959,158 1959,318 2033.83,392.83 U5.22@2180.79,392.83
LOCK_LED: BITE1.2 U5.54 | length 129.8
  Top Layer w10: U5.54@2779.21,392.83 BITE1.2@2909,392.8
N303_1PPS: C13.2 LED1.2 R8.2 T1.1 U3.3 | length 2793.8
  Top Layer w25: C13.2@1760,807 R8.2@1930,807 ; U3.3@2929,1956.8 3109.8,1956.8 LED1.2@3223,2070 ; T1.1@3059,1959 3084,1959 3195,2070 LED1.2@3223,2070 ; LED1.2@3237.2,2070 LED1.2@3223,2070
  Bottom Layer w25: v2(1833,808) 2386,808 2897,1319 3026,1319 3060,1353 T1.1@3060,1959
Net7_1: 7.1 LED3.2 R21.1 U10.2 | length 680.3
  Top Layer w25: U10.2@3221.37,423.92 3221.37,558.63 3033,747 ; 3033,747 3020,760 LED3.2@2985.8,760 2998.8,747 3033,747
  Top Layer w50: LED3.2@2985.8,760 2998,772.2 7.1@2998,929
Net10M_1: 10M.1 P6.1 R24.2 | length 299.5
  Top Layer w25: R24.2@3259,1426 P6.1@3259,1648.5
  Top Layer w45: R24.2@3259,1426 10M.1@3336,1426
NetBITE1_1: BITE1.1 R22.1 | length 86
  Top Layer w40: BITE1.1@2909,318 R22.1@2995,318
NetBT1_1: BT1.1 D4.1 | length 1083.1
  Top Layer w25: v1(2050,2125) D4.1@2115,2125
  Bottom Layer w25: v1(2050,2125) 2050,2634 BT1.1@2410,2994
NetC21_2: C21.2 R12.1 R13.2 | length 160
  Top Layer w25: R12.1@999,726 1080,726 R13.2@1159,726
NetC22_2: C22.2 R13.1 R14.2 | length 158
  Top Layer w25: R13.1@1249,726 1329,726 R14.2@1407,726
NetD1_2: D1.2 L3.1 | length 181.4
  Top Layer w80: D1.2@423,3720 603,3720 L3.1@604,3721
NetD2_2: D2.2 L1.1 U2.2 | length 802.2
  Top Layer w80: U2.2@1670.02,3375.01 1670.02,3252.98 1737,3186 L1.1@2075,3186 ; D2.2@2060,3008 2060,3171 L1.1@2075,3186 ; L1.1@2093,3186 L1.1@2075,3186 ; L1.1@2107,3218 L1.1@2075,3186
NetD3_2: D3.2 D4.2 U3.22 | length 327.1
  Top Layer w15: D3.2@2252.8,2020 2312,2020 2375.2,1956.8 U3.22@2448.68,1956.8
  Top Layer w40: D3.2@2252.8,2020 D4.2@2252.8,2125
NetL2_1: L2.1 L3.2 | length 299.4
  Top Layer w80: L3.2@604,3534 604,3236 L2.1@605,3235
NetL7_2: L7.2 U8.2 | length 150
  Bottom Layer w50: L7.2@220,1795 U8.2@220,1945
NetLED1_1: LED1.1 R1.2 | length 110
  Top Layer w45: R1.2@3312,1960 LED1.1@3312,2070
NetLED2_1: LED2.1 R3.2 | length 109.3
  Top Layer w40: LED2.1@2972,3736 2992,3716 R3.2@2992,3635
NetLED3_1: LED3.1 R19.2 | length 83.7
  Top Layer w40: R19.2@2907,678 2911,682 LED3.1@2911,760
NetP2_1: P2.1 U3.11 | length 332.4
  Top Layer w25: U3.11@2929,2378.06 3259.94,2378.06 P2.1@3261,2377
NetP3_2: P3.2 R5.2 U3.21 | length 1335.2
  Top Layer w15: R5.2@2196.56,2225 v1(2318,2225) 2339,2204 2339,2038 2376.9,2000.1 U3.21@2448.68,2000.1
  Bottom Layer w12: P3.2@2174,1397.57 2183.57,1397.57 2318,1532 v1(2318,2225)
NetP3_3: P3.3 R6.2 U3.20 | length 1375
  Top Layer w15: R6.2@2196.56,2305 2326,2305 v1(2361,2270) 2361,2060 2377.59,2043.41 U3.20@2448.68,2043.41
  Bottom Layer w15: P3.3@2174,1497 2278,1601 2278,2257 2291,2270 v1(2361,2270)
NetR2_1: R2.1 R4.2 U2.4 | length 665.9
  Top Layer w30: U2.4@1670.02,3525.01 1670.02,3655.02 1777,3762 2008,3762 R4.2@2053,3807
  Top Layer w40: R4.2@2053,3821 R2.1@2143,3821
NetR7_1: R7.1 U3.8 | length 147.9
  Top Layer w25: U3.8@2928.87,2248.13 2988.87,2248.13 R7.1@3051,2186
NetR7_2: R7.2 U3.9 | length 128.4
  Top Layer w25: U3.9@2929,2291.44 3035.56,2291.44 R7.2@3051,2276
NetR8_1: R8.1 U5.1 | length 161.1
  Top Layer w10: R8.1@2020,807 2020.78,806.22 U5.1@2180.79,806.22
NetR9_1: R9.1 R10.2 U7.3 | length 150.4
  Top Layer w25: R9.1@762,867 804,867 ; U7.3@782.04,803.74 782.04,845.04 804,867 ; R10.2@840,867 804,867
NetR9_2: R9.2 T5.1 U6.1 U7.4 | length 356.9
  Top Layer w25: U6.1@416,727 482,727 T5.1@557,802 671.81,802 U7.4@673.61,800.2 673.61,865.39 R9.2@672,867
NetR11_1: R11.1 U5.12 | length 163.9
  Top Layer w10: R11.1@2017,590 2017.32,589.68 U5.12@2180.79,589.68
NetR12_2: R12.2 U7.1 | length 127.4
  Top Layer w25: U7.1@782,725 908,725 R12.2@909,726
NetR14_1: R14.1 T3.1 U5.5 | length 718.7
  Top Layer w10: T3.1@1552.52,727.48 U5.5@2180.79,727.48
  Top Layer w25: R14.1@1497,726 1586,726 T3.1@1587,727
NetR23_2: R23.2 U5.90 | length 104.4
  Top Layer w12: U5.90@2440.63,869.21 R23.2@2440.63,973.63
NetR24_1: R24.1 U9.4 | length 66.7
  Top Layer w25: R24.1@3259,1336 3259.2,1335.8 U9.4@3259.2,1269.39
NetR25_1: R25.1 U10.4 | length 71.7
  Top Layer w25: R25.1@3257,604 3257,532.58 U10.4@3257.2,532.39
NetR26_2: R26.2 U5.88 | length 148.1
  Top Layer w12: U5.88@2480,869.21 2480,924 R26.2@2546,990
NetR27_1: R27.1 U5.37 | length 102.3
  Top Layer w12: R27.1@2439,182 2447,182 2460.32,195.32 U5.37@2460.32,270.79
NetR28_1: R28.1 U5.39 | length 109.4
  Top Layer w12: U5.39@2499.68,270.79 2499.68,194.32 R28.1@2523,171
REF5V: C14.2 C15.2 C18.1 C19.1 pad.1@585,641 U4.6 U6.5 U7.5 | length 1425.1
  Top Layer w20: U6.5@307.58,727 307.58,664.42 C18.1@316,656 371,601 502,601 ; U4.6@510.3,459 545,459 C14.2@603,517 652.8,566.8 ; C19.1@673.58,656.58 U7.5@673.58,725 ; 502,601 588,687 603,687 ; 502,601 526,601 ; 526,601 581,656 pad.1@600,656 ; 526,601 550,601 ; 550,601 633,601 ; 550,601 550,606 pad.1@585,641 pad.1@600,656 ; pad.1@600,656 pad.1@618,656 ; pad.1@600,656 603,659 603,687 ; 603,687 618,687 pad.1@618,656 ; pad.1@618,656 618,616 633,601 ; pad.1@618,656 C19.1@673,656 673,615 ; 633,601 659,601 ; 652.8,566.8 673,587 C15.2@673,587.8 ; 652.8,566.8 C15.2@694,566.8 C15.2@673,587.8 ; 659,601 673,615 ; 659,601 659.8,601 C15.2@673,587.8 ; C15.2@673,587.8 673,615
TOD_RX: U5.27
TOD_TX: P4.3 U5.26 | length 1381.4
  Top Layer w10: P4.3@1083,151 1218,16 2090,16 2243.78,169.78 U5.26@2243.78,270.79
VCC5V: C23.1 C24.2 L5.1 L6.1 U8.5 Y1.3 Y2.2 | length 4469.5
  Top Layer w30: 641.77,2130.23 656,2116 656,2103
  Top Layer w60: C23.1@2090,2435 C23.1@2110,2455 ; C23.1@2110,2455 2110,2493 2110,2692 2113,2695 L5.1@2141.6,2695 L6.1@2141.6,2610 C24.2@2141.6,2525 2141.6,2486.6 C23.1@2110,2455
  Top Layer w80: Y1.3@360,1618.9 360,1733 ; U8.5@1819.21,2744.21 1819.21,2496.79 ; C23.1@2090,2435 2052,2435 ; 2110,2493 2052,2435 ; 360,1733 360,1807 467.5,1914.5 ; 360,1733 467.5,1840.5 ; 467.5,1840.5 510.27,1883.27 510.27,1957.27 ; 467.5,1840.5 467.5,1914.5 ; 467.5,1914.5 510.27,1957.27 ; 467.5,1914.5 467.5,1955.96 510.27,1998.73 ; 510.27,1957.27 585,2032 ; 510.27,1957.27 510.27,1998.73 ; 510.27,1998.73 Y2.2@585,2073.46 ; 585,2032 656,2103 988,2435 ; 585,2032 Y2.2@585,2073.46 ; Y2.2@585,2073.46 641.77,2130.23 946.54,2435 988,2435 ; 988,2435 1760,2435 ; 1760,2435 1881,2435 ; 1760,2435 1819.21,2494.21 1819.21,2496.79 ; 1819.21,2496.79 1881,2435 ; 1881,2435 2052,2435
pads on no net: P5.6 P5.7 P5.8 U2. U3.1 U3.2 U3.4 U3.5 U3.6 U3.7 U3.14 U3.15 U3.16 U3.17 U3.18 U3.19 U4.1 U4.3 U4.5 U4.7 U4.8 U5.2 U5.3 U5.4 U5.6 U5.7 U5.8 U5.14 U5.15 U5.16 U5.17 U5.18 U5.19 U5.20 U5.21 U5.28 U5.29 U5.30 U5.33 U5.34 U5.35 U5.36 U5.38 U5.40 U5.41 U5.42 U5.43 U5.44 U5.47 U5.48 U5.49 U5.50 U5.51 U5.52 U5.53 U5.55 U5.56 U5.57 U5.58 U5.61 U5.62 U5.64 U5.66 U5.67 U5.68 U5.69 U5.70 U5.71 U5.81 U5.82 U5.83 U5.84 U5.85 U5.86 U5.87 U5.89 U5.91 U5.92 U5.95 U5.96 U5.97 U5.98 U5.99 U5.100 U8. U8.6 U8.7 U8.8 U8.J1-1 U8.J1-2 U8.J1-3 U8.J1-4 U8.J1-5 U8.J1-6 U8.J1-7 U8.J1-8 U8.J1-9 U8.J1-10 U8.J1-11 U8.J1-12 U8.J1-13 U8.J1-14 U8.J1-15 U8.J1-16 U8.J1-17 U8.J1-18 U8.J1-19 U8.J1-20 Y1.2
copper on no net: | length 1482.8
  Top Layer w10: 2676.85,270.79 2676.85,166.15 2698,145 2698,111 ; 2696.54,270.79 2696.54,196.46 2750,143 2750,111 ; 2716.22,270.79 2716.22,220.78 2803,134 2803,111 ; 2779.21,353.46 2822.54,353.46 2839,337 2839,275 2912,202 2912,139 2912,111 ; 2779.21,373.15 2839.85,373.15 2852,361 2859,354 2859,286 2966,179 2966,112 ; 2814.22,333.78 2814.22,265.78 2855,225 2855,111

## Keep-outs
Keep-Out Layer:
  the board outline again, w7

## Other copper
Top Layer:
  rectangle net GND: 2990,2421.36 3103,2533
  rectangle net GND: 3061,2897 3128,3082
  rectangle net GND: 3301,2857 3387,3082
  rectangle net GND: 3060,3066 3397,3336
  rectangle net GND: 2517,1818 2866,2430
  rectangle net GND: 2530.5,2421.36 2856,2492
  rectangle net GND: 1258,1704 1484,2199
  rectangle net GND: 1086,2157 1284,2355
  rectangle net +3.3V: 2598,1580 2854,1758
  rectangle net GND: 2661,46 3059,77
  rectangle net GND: 3003,67 3052,255
  rectangle net GND: 1125,2956 1382,3865
  region net GND: 474,997 629,997 629,984 476,831
  region net GND: 2262,1237 2662,1237 2726,1301 3029,1301 3031,1303 3036,1298 3036,1253 2921,1138 2921,1096 2874,1096 2815,1037 2815,846 2814,845 2760,845 2760,959 2685,1034 2685,1110 2626,1169 2626,1186 2269,1186 2262,1179
  region net GND: 305,366 307,364 751,364 773,386 773,580 806,580 814,588 814,656 1004,656 1022,638 1022,544 1039,527 1432,527 1437,522 1433,518 1433,390 1419,376 1419,341 1342,341 1283,282 1283,216.5 306.5,216.5
  region net GND: 1408,661.5 1613.75,661.5 1596.25,644 1607,633.25 1607,537 1652,537 1733,456 1733,447 1917,447 1926,438 1858,370 1858,367 1638,367 1633,372 1633,394 1416,394 1415,395
  region net GND: 1154,663 1269,663 1269,533 1146,533 1145,532
  region net GND: 8,364 10,366 305,366 305,38 308,35 301,28 -2,28
  region net GND: 2295,1837 2534,1837 2540,1831 2540,1521 2325,1521 2258,1588 2244,1588 2244,1625 2211.96,1657.04 2115,1657.04 2112.96,1659.07 2112.96,1770 2217,1770 2222,1765 2299.5,1842.5 2302.5,1842.5
  region net GND: 2513,2762 2520,2769 2989,2769 3064,2844 3064,2880 3385.5,2880 3392.5,2887 3394.5,2885 3394.5,2549 3135,2549 3076,2490 3076,2479 2385,2479 2468,2562 2468,2715 2460,2723
  region net GND: 1420,2370 2042,2370 1911,2239 1911,2159 1913,2157 1911,2155 1911,2144 1715,2144 1628,2057 1622,2057 1622,1743 1611,1732 1604,1739 1429,1739 1429,2289 1424,2294
  region net GND: 1421,1758 1893,1758 1913,1738 1913,1224 1910,1221 1824,1221 1824,1302 1759,1367 1569,1367 1425,1223
  region net GND: 1240,2139 1348,2139 1354,2133 1345,2124 1345,1871 1095,1871 1095,2000 1180,2000 1182,1998 1184,2000 1210,2000 1241,2031 1241,2130
  region net GND: 1222.5,1862 1359,1862 1352.5,1829.5 1333,1797 1318,1782 1322,1778 1322,1694 1286,1658 1286,1544 1091,1544 1079,1556 1084,1561 1084,1725 1213,1725 1222.5,1734.5
  region net GND: 1028,2355 1086,2355 1086,1544 718,1544 717,1543 717,2044
  region net GND: 717,1543 1424,1543 1425,1544 1430,1539 1430,984 1484,930 1484,920 582,920 578,924 713,1059 713,1070
  region net GND: 2044,1334 2111,1267 2111,1039 2203,947 2203,846 2088,846 2069,865 1910,865 1899,876 2032,1009 2041,1009
  region net GND: 2383.35,800 2603,800 2616,787 2616,601 2667,550 2710,550 2711,549 2711,510.94 2629.94,510.94 2594,475 2594,371 2562,339 2361.89,339 2361.89,349.89 2383.35,371.35
  region net GND: 1647,392 1649,394 1863,394 1863,375 1762,274 1689,274 1639,324 1639,396
  region net GND: 2478,3309 2482,3313 2875,3313 2875,2960 2878,2957 2874,2953 2603,2953 2458,3098
  region net GND: 2696,3878 2696,3757 2666,3727 2529,3727 2529,3645 2539,3635 2799,3635 2799,3874 2795,3878
  region net GND: 2308,3878 2308,3786 2341,3753 2341,3752 2419,3752 2536,3635 2536,3726 2546,3736 2529,3753 2524,3753 2524,3870 2514,3880
  region net GND: 2989,3897 3392,3897 3394.5,3899.5 3394.5,3313 3060,3313 3060,3336 3056,3375 3060,3375 3060,3823 3005,3878
  region net GND: 439,3452 511,3452 511,3130 535,3106 285,3106 285,3230 253,3262 253,3266
  region net GND: 1,3897.5 3,3899.5 395.5,3899.5 338,3842 338,3610 335,3610 212,3487 5,3487
  region net GND: 3070,322 3076,322 3121,367 3394,367 3394,32.34 3394.5,31.84 3056,31.84
  region net GND: 553,2944 1863,2944 1953,2854 1953,2847 1542,2847 1512,2817 1512,2586 1466,2540 1466,2531 909,2531 602,2224 583,2224 583,2863 587,2867 523,2931 523,2940
  region net GND: 1897,2848 1970,2848 2061,2757 2043,2739 2043,2553 2006,2516 1925,2516 1925,2828 1909,2844
Bottom Layer:
  rectangle net GND: 133,2346 621,2659
  rectangle net GND: 1469,655 1498,858
  rectangle net GND: 1288,2336 1433,2468
  rectangle net GND: 1289,2100 1430,2223
  rectangle net GND: 226,1312 592,1545
  rectangle net GND: 3105,2106 3394.5,2209
  rectangle net GND: 3131,1814 3388,2060
  region net GND: 1912,2961 2197,2961 2198,2962 2198,2952 1950,2704 1942,2712 1912,2712
  region net GND: 3075,447 2404,447 2815,858 3032,858 3075,901
  region net GND: 704,3900 1416,3900 1418,3898 1360,3840 1360,3326 1364.5,3321.5 1357,3314 919,3314 886,3281 886,3088 700,3088 692,3096
  region net GND: 289,3500 525,3500 532,3493 526,3487 526,3175 611,3090 1318,3090 1441,2967 1441,2864 614,2864 592,2842 511,2923 511,2948 127,2948 124,2951 129,2956 129,3073 231,3073 285,3127
  region net GND: 385,754 473,754 505,722 505,564 495,554 385,554
  region net GND: 1301,358 1672,358 1672,349 1554,231 1192,231
  region net GND: -5.5,570 289,275.5 289,107 361,35 361,22 3,22 -5.5,30.5
  region net GND: -5.5,3899.5 0,3894 550,3894 550,3496 530,3476 95,3476 2,3383
  region net GND: 1621,3755 1544,3678 1367,3678 1367,3327 1363,3323 1366,3320 1542,3320 1583,3361 1583,3585 1627,3629 1621,3635
  region net GND: 1600,3898 3394.5,3898 3394,3897.5 3394,3114 3135,3114 3086,3065 3086,2938 3084,2940 2642,2940 2470,3112 2347,3112 2347,3094 2219,2966 1717,2966 1890,3139 1890,3706 1761,3706 1752,3715 1679,3642 1622,3642 1617,3647
  region net GND: 1778,862 1777,861 1777,773 2404,773 2412,765 2302,655 1616,655 1669.37,708.37 1669.37,792.63 1665,797
  region net GND: 1936,1195 1960,1171 1996,1171 1996,1131 2172,955 2172,869 2007,869 1967,909 1789,909 1907,1027 1907,1062
  region net GND: 1426,1721 1957,1721 1949,1713 1949,1201 1900,1201 1867,1234 1867,1245 1823,1245 1817,1251 1817,1314 1762,1369 1756,1363 1573,1363 1573,1355 1408,1190 1408,1527 1426,1545
  region net GND: 1955,2708 1955,1700 1946,1709 1438,1709 1405,1742 1405,1932 1356,1981 1356,2190 1369,2203 1370,2202 1421,2202 1421,2476 1450,2505 1752,2505
  region net GND: 1126,2472 1296,2472 1298,2470 1298,2039 1125,2212
  region net GND: 618,2841 621,2844 1467,2844 1467,2519 1449,2501 760,2501 634,2627
  region net GND: 621,2610 743,2488 1045,2488 1068,2465 1068,2028 1158,1938 1121,1901 1121,1741 1106,1726 1144,1688 1231,1688 1231,1107 1248,1090 1236,1078 583,1078 583,1601 697,1715 697,2111 618,2190 618,2202
  region net GND: 2524,2823 3291,2823 3296,2818 3284,2806 3284,2585 3137,2585 3094,2542 3072,2542 3072,2095 3052,2075 2972,2075 2972,1606 2615,1249 2278,1249 2371,1342 2371,2145 2416,2190 2416,2369 2504,2457 2504,2486
  region net GND: 3184,1373 3396,1373 3383,1360 3383,1136 3373,1136 3184,1325
  region net GND: 2866,783 2869,780 2995,780 2995,508 2975,488 2585,488
  region net GND: 1197,929 1200,926 1302,926 1302,648 1303,647 1191,647
  region net GND: 133,879 256,879 258,881 367,772 367,581 439,509 439,502 522,502 637,617 637,849 581,905 575,905 575,925 585,935 592,928 962,928 962,678 573,289 573,281 536,281 144,673
  region net GND: 2234,359 2235,358 2642,358 2642,40 2648,34 2190,34 2190,86 2217,113 2147,183 2147,195 2164,212 2166,210 2212,210 2212,337
  region net GND: 2642,358 2647,363 3319.5,363 3394.5,438 3399,433.5 3399,71 3023,71 3021,69 3018,72 3018,170 2629,170 2628,169 2622,175 2622,355

## Silkscreen, mask and mechanical layers (free items; w line width, h text height)
Top Overlay:
  text "12V" at 399,3455 h80 r270
  text "GND" at 3153,3454 h60
  text "GND" at 399,3249 h80 r270
  text "5V" at 2423,2682 h60
  text "GPS-ANT" at 3164,2553 h60
  text "1PPS" at 3000,1862 h60
  text "10M" at 3306,1822 h60
  text "GPSDO-V3.0" at 2034,1715 h100
  text "GND" at 2334,1578 h60
  text "TX" at 2333,1479 h60
  text "RX" at 2333,1373 h60
  text "3.3V" at 2336,1221 h60
  text "40K" at 2946,1163 h60
  text "1PPS" at 3276,1092 h60
  text "GND" at 2046,977 h60
  text "1PPS" at 2810,912 h60
  text "FR-C" at 122.25,858 h60
  text "GND" at -2,755 h60
  text "PWM" at 1650,719 h60
  text "5Vref" at 495,689 h60
  text "GND" at 3299,460 h60
  text "TOD-TX" at 1119,311 h60 r90
  text "12V" at 325,305 h60
  text "12V" at 458,305 h60
  text "GND" at 1303,305 h60 r90
  text "GND" at 1205,304 h60 r90
  text "40K" at 920,303 h60 r90
  text "1PPS" at 1014,303 h60 r90
  text "10M" at 836,302 h60 r90
  text "GR" at 619,301 h60 r90
  text "GT" at 709,301 h60 r90
  text "GND" at 2190,129 h60
Top Solder:
  rectangle: 2598,1581 2860,1760

## Text inside footprints (layer, text, board x,y; h text height)
BT1: Top Overlay "+" at 2481,2970 h30
C9: Top Overlay "+" at 803,3352 h30
C11: Top Overlay "+" at 2520,3367 h30
U8: Top Overlay "20" at 1971.3,1864.3 h30 r90; Top Overlay "2" at 1971.3,2044.9 h30 r90; Top Overlay "19" at 1674.7,1863.3 h30 r90; Top Overlay "1" at 1674.7,2041.1 h30 r90; Bottom Overlay "8-232RX" at 1355,1458 h40 r90; Bottom Overlay "7-232TX" at 1433,1456 h40 r90; Bottom Overlay "6-BITE" at 1511,1452 h40 r90; Bottom Overlay "5-VCC" at 1926.8,2829.7 h40 r90; Bottom Overlay "3-RFout" at 154.4,1275.4 h40 r90; Bottom Overlay "2-CASE GND" at 154.4,2095.7 h40 r90; Bottom Overlay "1-Vcon" at 151.9,2881.9 h40 r90; Bottom Overlay "4-GND" at 1918.9,1226.4 h40 r90
Y1: Top Overlay "CV/NC" at 428,2266 h40; Top Overlay "RV/NC" at 428,1932 h40; Top Overlay "VCC" at 417,1598 h40; Top Overlay "GND" at 1198,2255 h40; Top Overlay "RFOUT" at 1131,1598 h40
Y2: Top Overlay "Vcon/NC" at 636,1778 h40; Top Overlay "VCC" at 632,2054 h40; Top Overlay "RFout" at 983,2055 h40; Top Overlay "GND" at 1022,1767 h40